# Altium PCB carte_puissance.PcbDoc
Units mil, origin at the board's own origin, x right, y up, seen from the top; angles counter-clockwise.
Board outline 1929.13 x 2500 mil, 4 copper layers (Top Layer, Internal Plane 1, Internal Plane 2, Bottom Layer); 11 components, 9 nets, 38 pads, 3 vias.
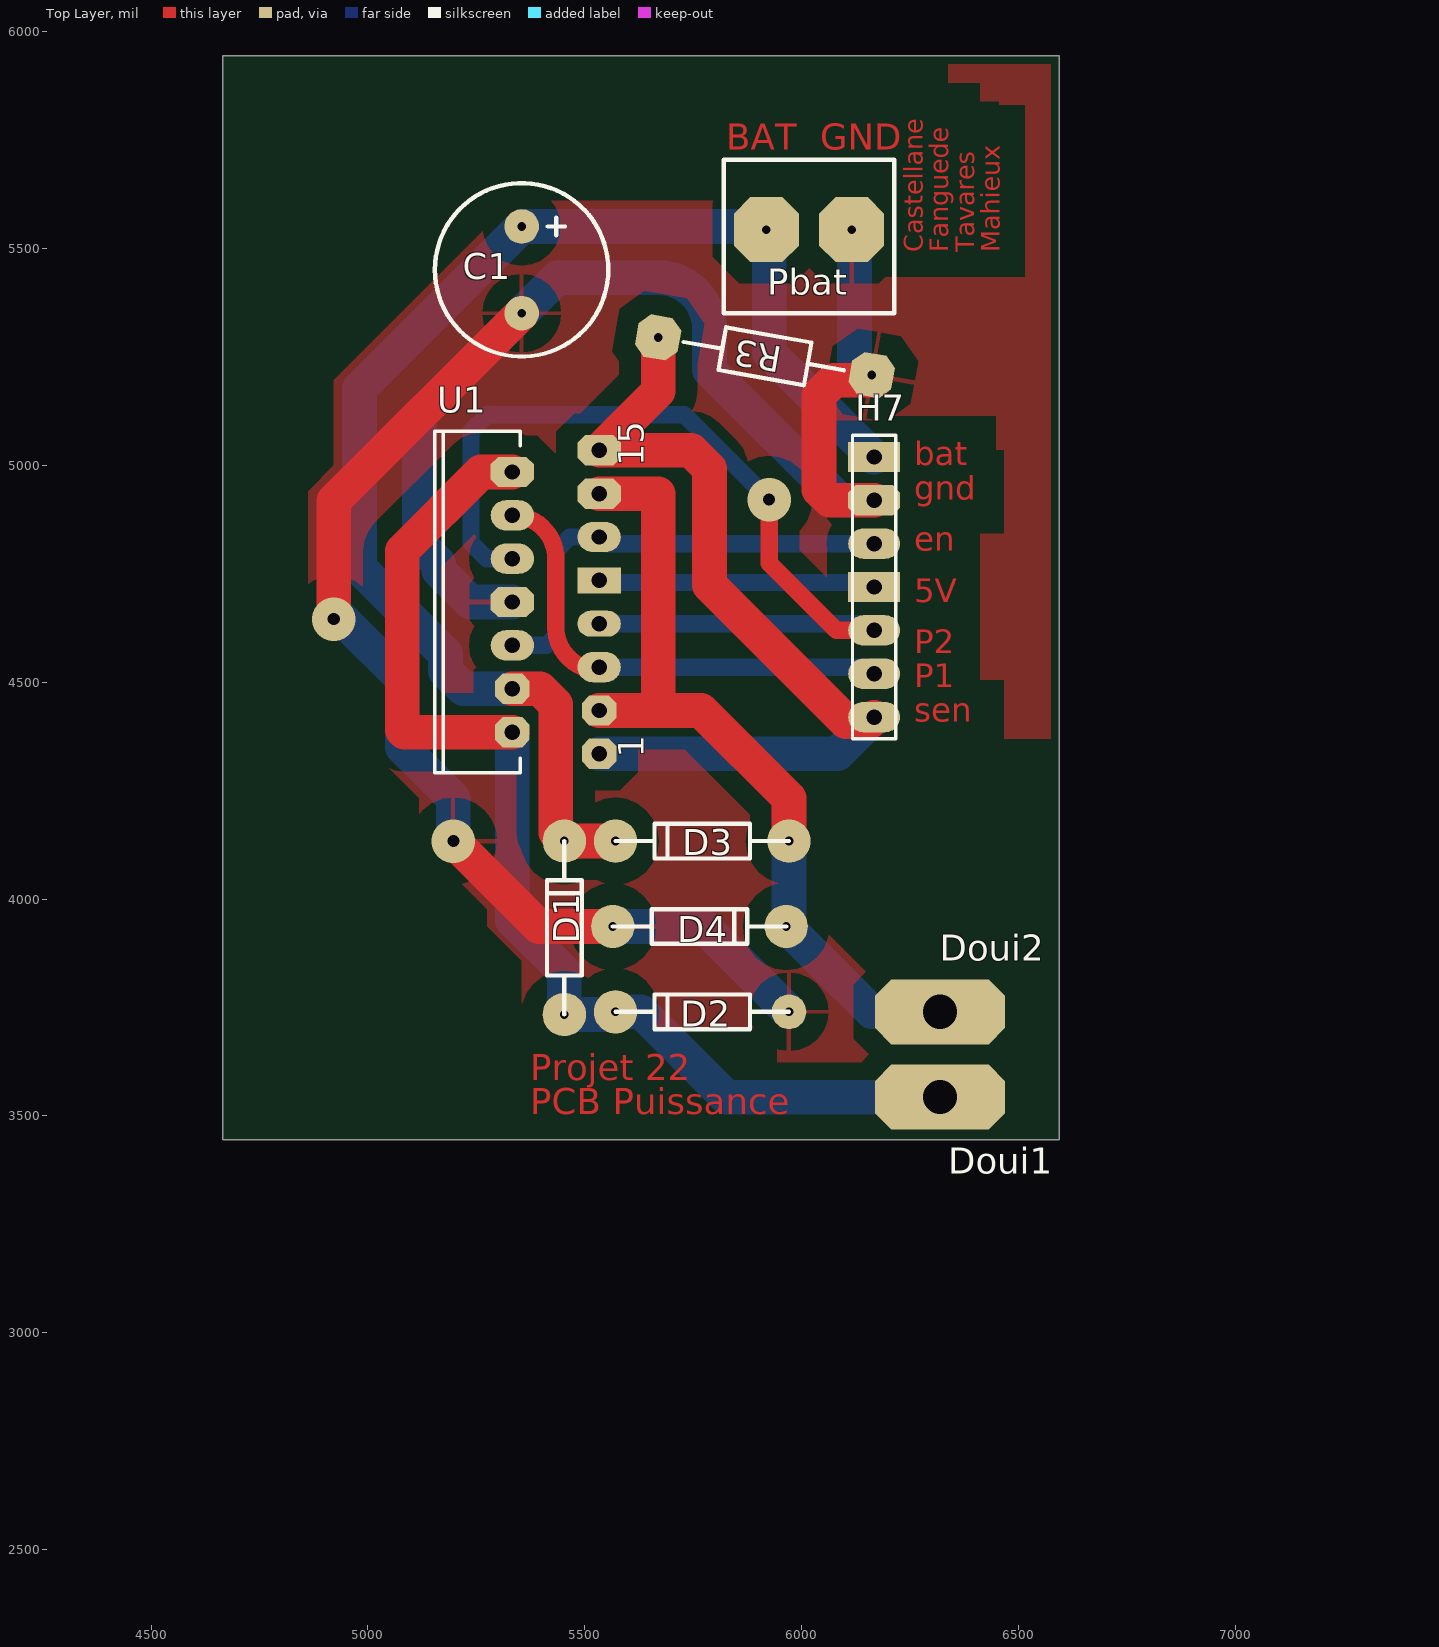
[diagram p0: Top Layer view]
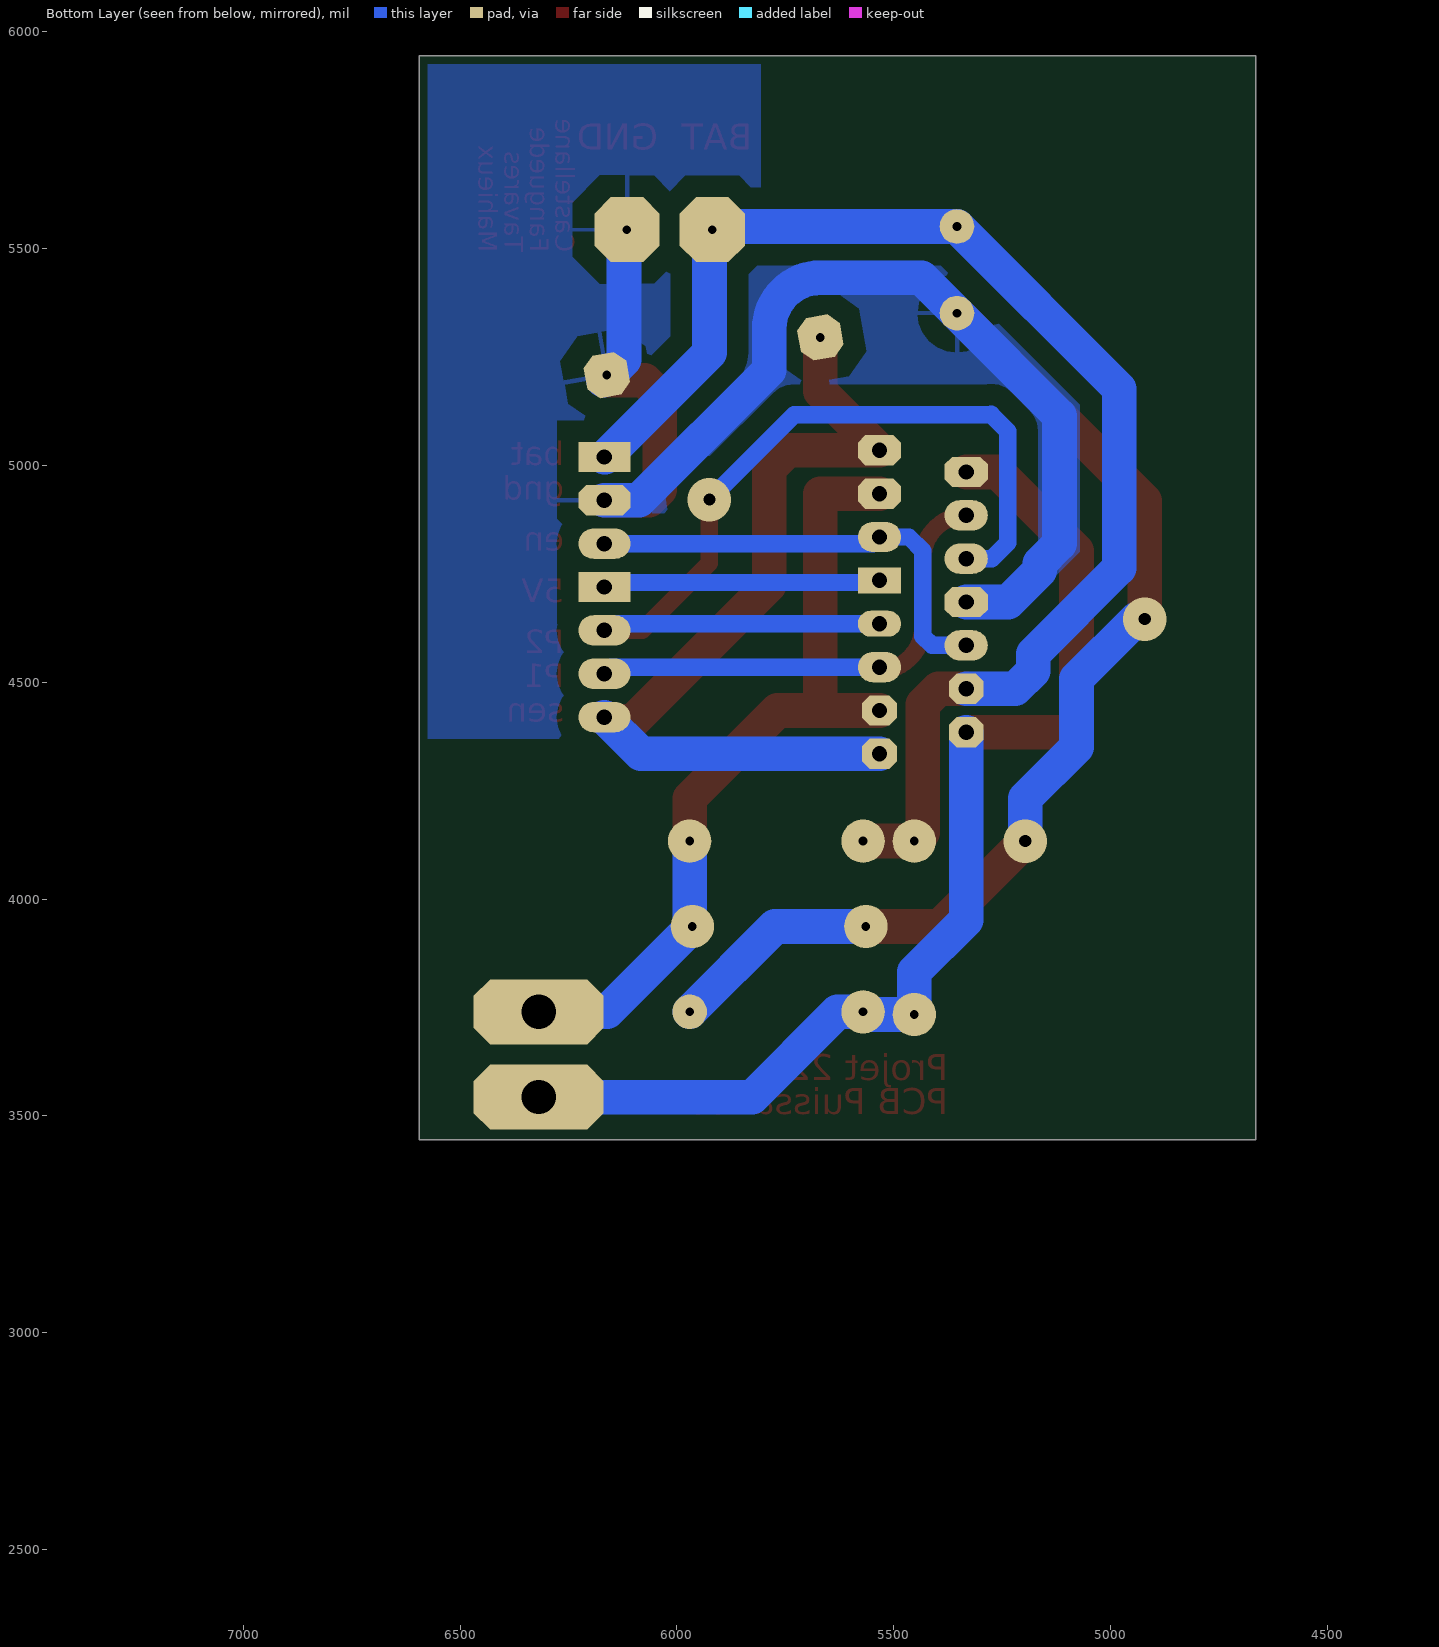
[diagram p1: Bottom Layer view, seen from below]
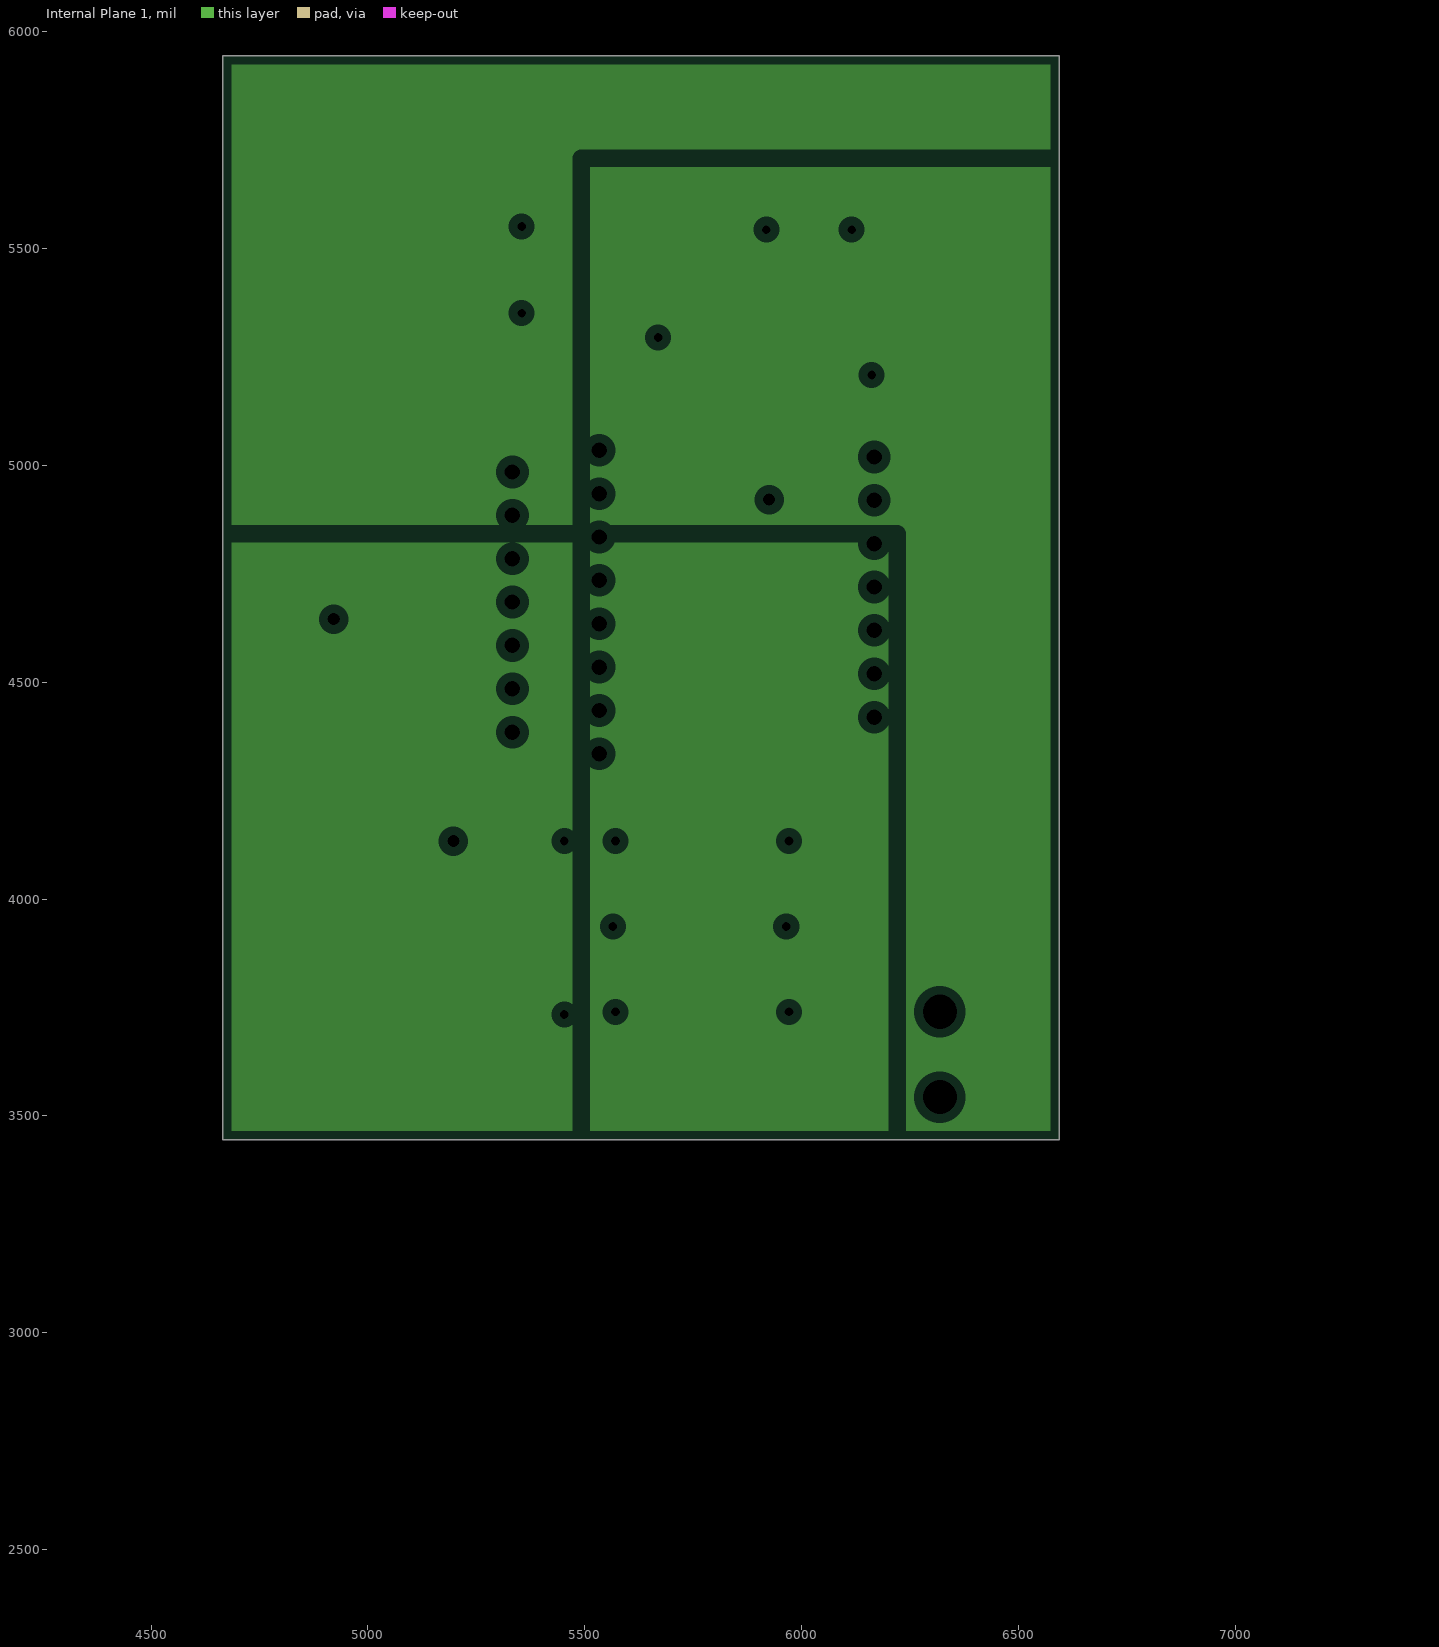
[diagram p2: Internal Plane 1, clearances drawn from the general rule]
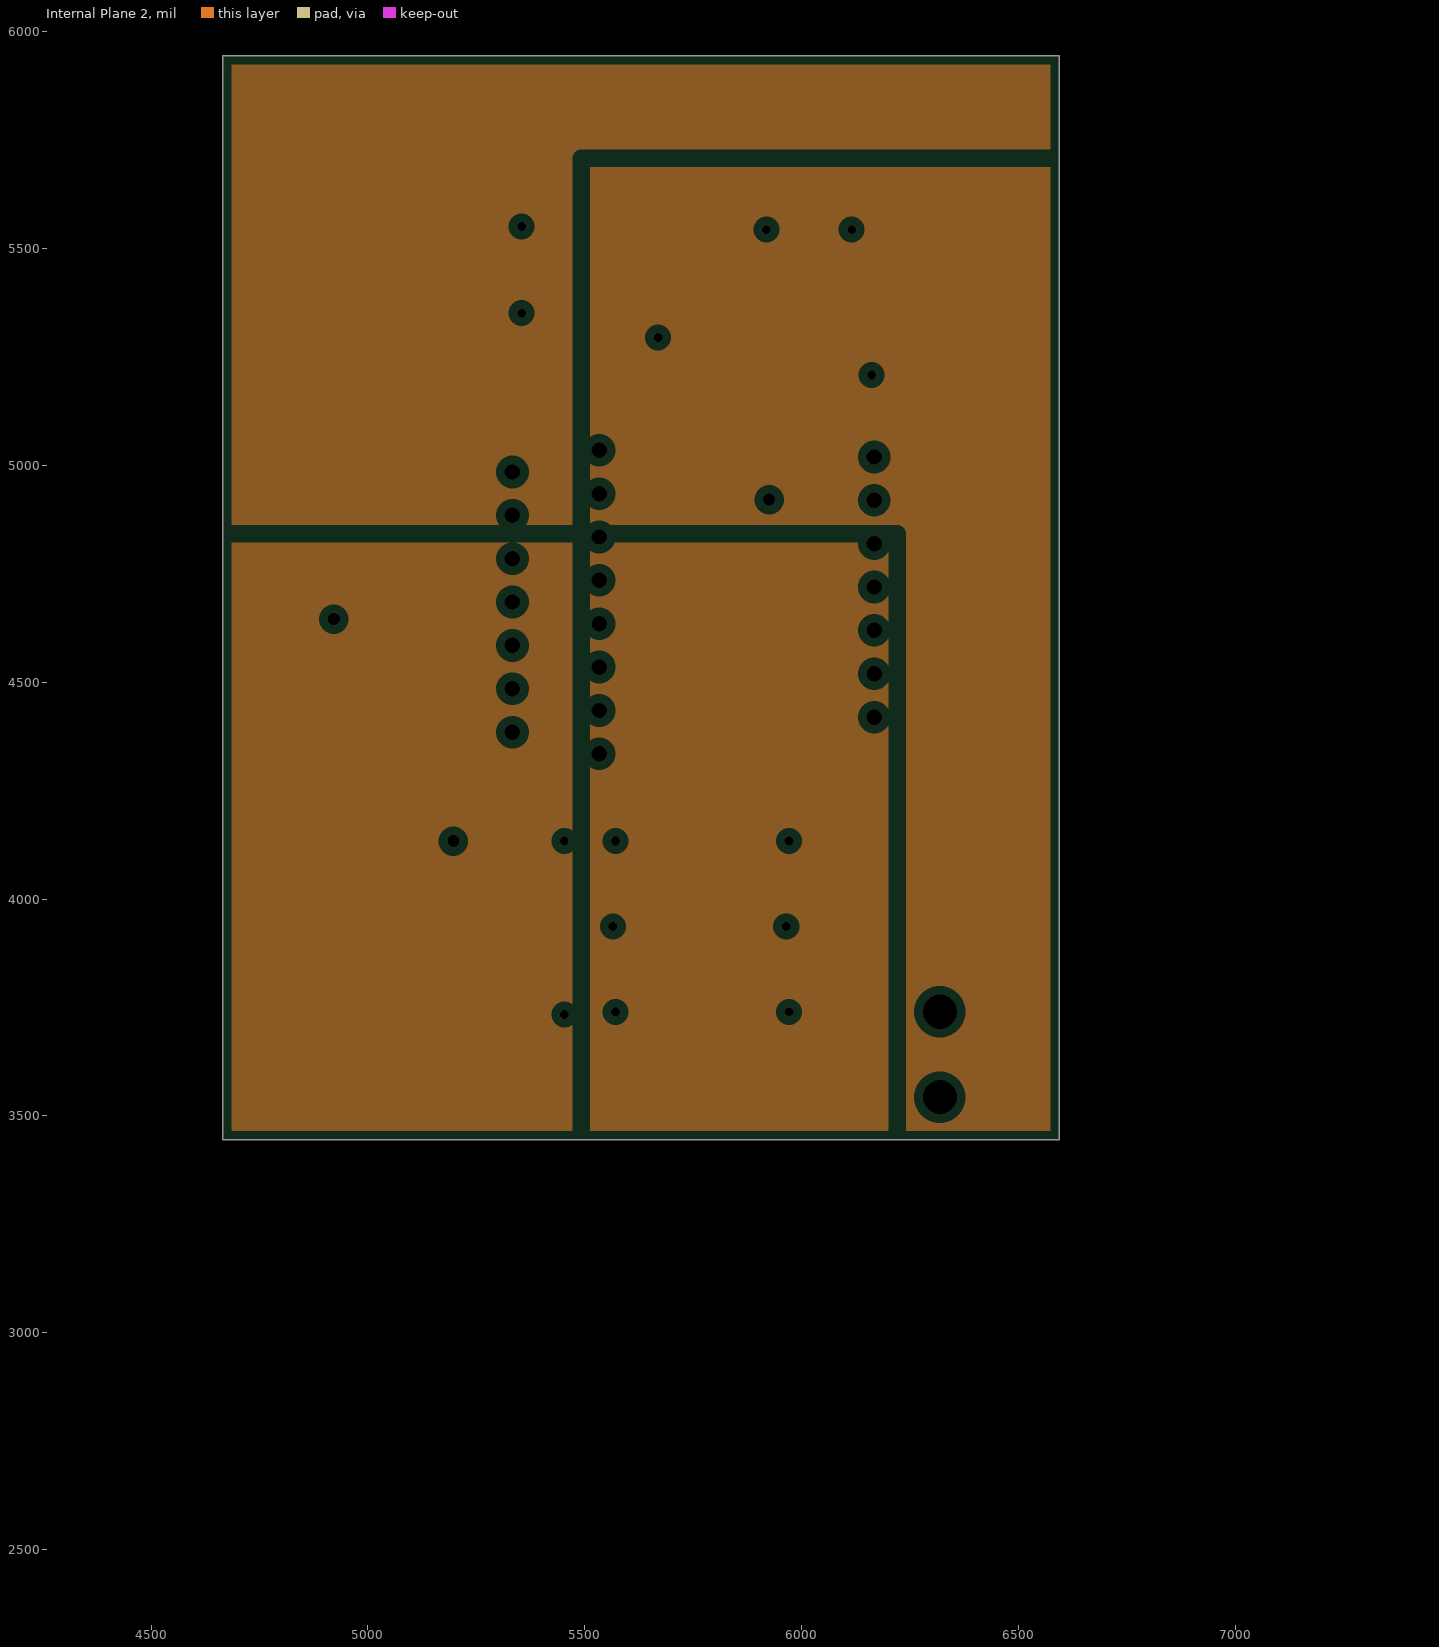
[diagram p3: Internal Plane 2, clearances drawn from the general rule]

## Layer stack, top to bottom
Top Layer: signal copper 1.4
Dielectric: dielectric 12.6, FR-4, Dk 4.8
Internal Plane 1: plane copper 1.4
Dielectric: dielectric 12.6, FR-4, Dk 4.8
Internal Plane 2: plane copper 1.4
Dielectric: dielectric 12.6, FR-4, Dk 4.8
Bottom Layer: signal copper 1.4

## Board outline
4665.35,5944.88 6594.49,5944.88 6594.49,3444.88 4665.35,3444.88

## Design rules (kind name [scope] priority, off if disabled: settings)
Clearance [All] p1: gap=20
FabricationTestPointUsage TestPointUsage [All] p1: valid=0 allowmultiple=FALSE
FabricationTestpoint Testpoint [All] p1: side=3 testpointundercomponent=TRUE minsize=40 maxsize=100 preferedsize=60 minholesize=0 maxholesize=40 preferedholesize=32 testpointgrid=1 allowsidetop=TRUE allowsidebottom=TRUE usegrid=TRUE gridtolerance=0.01
PlaneClearance [All] p1: clearance=20
PlaneConnect [All] p1: planeconnectstyle=Relief reliefexpansion=20 reliefentries=4 reliefconductorwidth=10 reliefairgap=10
PolygonConnect [All] p1: connectstyle=Relief reliefconductorwidth=10 reliefentries=4 polygonreliefangle="90 Angle"
RoutingVias [All] p1: holewidth=20 width=70 viastyle="Through Hole" minholewidth=28 minwidth=50 maxholewidth=28 maxwidth=50
SilkscreenOverComponentPads [All] p1: minsilkscreentomaskgap=10
SolderMaskExpansion [All] p1: expansion=4
Width [All] p1: maxlimit=200 minlimit=20 preferedwidth=40
23 further rules are at their usual default settings.

## Components (designator, comment, footprint, x,y, rotation, side; value= is the part's Value field where it differs from the comment)
C1 "Cap Pol2" Capa2_pol 5354.33,5551.18 r270 top
D1 "Diode 1N4148" Ddiode#1 5452.76,4133.86 r270 top
D2 "Diode 1N4148" Ddiode#2 5570.87,3740.16 r0 top
D3 "Diode 1N4148" Ddiode#1 5570.87,4133.86 r0 top
D4 "Diode 1N4148" Ddiode#1 5964.57,3937.01 r180 top
Doui1 "douille_2mm" Douille-2mm 6318.9,3543.31 r90 top
Doui2 "douille_2mm" Douille-2mm 6318.9,3740.16 r90 top
H7 "Header 7" HDR1X7 6167.44,5019.69 r270 top
Pbat "Batterie" Bornier_2 5820.2,5543.74 r0 top
R3 "Res2" res5_1/4W 5669.29,5295.28 r350 top
U1 "L298N" Multiwatt15V 5433.07,4685.04 r90 top

## Footprints (in the part's own frame and the unit in brackets; to place one, negate y for a bottom-side part, rotate by r counter-clockwise, add the part's x,y. Pads: shape width x height; smd on the part's side, far side on the other; paste and mask are expansions set on the pad)
Bornier_2 [mil]
  oct 150x150 hole 20: 1(98.43,0) 2(295.28,0)
  silkscreen extent 0,-193 394,161
Capa2_pol [mil]
  round 80 hole 20: 1(0,0) 2(200,0)
  silkscreen extent -100,-200 300,200
Ddiode#1 [mil]
  round 100 hole 20: A(400,0) K(0,0)
  silkscreen extent 0,-40 400,40
Ddiode#2 [mil]
  round 80 hole 20: A(400,0)
  round 100 hole 20: K(0,0)
  silkscreen extent 0,-40 400,40
Douille-2mm [mm]
  oct 3.81x7.62 hole 2: 1(0,0)
HDR1X7 [mil] "Connector; Header; 7 Position"
  rect 70x120 hole 35.43: 1(0,0) 4(300,0)
  oct 70x120 hole 35.43: 2(100,0)
  oval 70x120 hole 35.43: 3(200,0) 5(400,0) 6(500,0) 7(600,0)
  silkscreen extent -50,-50 650,50
Multiwatt15V [mil] "TO, Thru-Hole, Vertical, Heatsink Mounted; 15 Bent Staggered Leads; Pitch 1.27 mm"
  oct 70x80 hole 35.43: 1(-350,-100) 2(-300,100) 3(-250,-100) 4(-200,100)
  oval 70x100 hole 35.43: 5(-150,-100) 6(-100,100) 10(100,100) 11(150,-100) 12(200,100)
  oval 60x100 hole 35.43: 7(-50,-100)
  oct 70x100 hole 35.43: 8(0,100) 13(250,-100) 14(300,100) 15(350,-100)
  rect 60x100 hole 35.43: 9(50,-100)
  silkscreen extent -394,82 394,279
res5_1/4W [mil]
  oct 100x100 hole 20: 1(0,0) 2(500,0)
  silkscreen extent 60,-50 435,50

## Part data
C1: "Polarized Capacitor (Radial)"
D1 D2 D3 D4: "High Conductance Fast Diode"
Doui1 Doui2: "1-Pin"
H7: "Header, 7-Pin"
Pbat: library part Bornier_2, "Header, 2-Pin"
R3: "Resistor"
U1: "Dual Full Bridge Driver"

## Via types
v1: diameter 100, hole 28, Top Layer to Bottom Layer, 3 vias

## Nets (pads, with @x,y where several pads share a name; then routed paths per layer and width w, separated by ;. In a path a pad name is that pad's centre, name@x,y a point inside that pad or via, vN(x,y) a via of type N, cw(c..) or ccw(c..) an arc to the next point about the centre after c; other vN are vias at no path point)
EN: H7.3 U1.6 U1.11 | length 1059.6
  Bottom Layer w40: U1.6 5411.81,4585.04 5433.07,4606.3 5433.07,4803.15 5464.96,4835.04 U1.11 5548.43,4819.69 H7.3
GND: C1.2 D2.A D4.A H7.2 Pbat.2 R3.2 U1.8 | length 5376.1
  Top Layer w80: v1(4921.26,4645.67) 4921.26,4918.11 C1.2 ; v1(5196.85,4133.86) 5393.7,3937.01 D4.A ; H7.2 6064.57,4919.69 6040,4944.25 6040,5162.05 6074.8,5196.85 R3.2@6169.29,5196.85
  Bottom Layer w80: v1(4921.26,4645.67) 4940.94,4645.67 5078.74,4507.87 5078.74,4350.39 5196.85,4232.28 v1(5196.85,4133.86) ; U1.8 5236.22,4685.04 5163.59,4757.67 5163.59,4773.99 5118.11,4819.46 5118.11,5114.96 C1.2 5436.22,5433.07 5669.29,5433.07 cw(c5669.29,5314.96) 5787.4,5314.96 5787.4,5219.87 6087.59,4919.69 H7.2 ; D4.A 5774.02,3937.01 D2.A ; Pbat.2@6122.05,5551.18 6122.05,5244.09 R3.2@6169.29,5196.85
MOTOR1: D1.A D2.K Doui1.1 U1.2 U1.14 | length 2524
  Top Layer w80: 5078.74,4389.76 5078.74,4803.15 5260.63,4985.04 U1.14 ; 5083.46,4385.04 U1.2
  Bottom Layer w80: U1.2 5333.07,3951.97 5452.76,3832.28 D1.A 5564.57,3733.86 D2.K 5629.92,3740.16 5826.77,3543.31 Doui1.1@6199.21,3543.31
MOTOR2: D3.A D4.K Doui2.1 U1.3 U1.13 | length 1891.8
  Top Layer w80: U1.3 5669.29,4435.04 ; U1.13 5669.29,4935.04 5669.29,4435.04 ; D3.A 5970.87,4232.28 5768.11,4435.04 5669.29,4435.04
  Bottom Layer w80: D3.A 5970.87,3943.31 D4.K 6043.31,3858.27 6161.42,3740.16 Doui2.1
PWM1: H7.6 U1.5 U1.12 | length 1131.4
  Top Layer w20: H7.6@6152.09,4535.04 H7.6
  Top Layer w40: U1.12@5333.07,4885.05 cw(c5333.07,4785.04) 5433.07,4783.46 5433.07,4625.98 ccw(c5533.07,4627.6) U1.5@5533.07,4527.58 ; U1.5@5514.08,4535.04 U1.5
  Bottom Layer w40: U1.5 H7.6@6152.09,4535.04
PWM2: H7.5 U1.7 U1.10 | length 2247.4
  Top Layer w40: v1(5925.2,4921.26) 5925.2,4774.8 6080.31,4619.69 H7.5
  Bottom Layer w40: 5275.59,5118.11 5275.59,5116.85 ; U1.10 5274.02,4785.04 5237.48,4821.57 5237.48,5078.74 5275.59,5116.85 ; U1.7 6152.09,4635.04 H7.5 ; v1(5925.2,4921.26) 5729.61,5116.85 5275.59,5116.85
SENSE: H7.7 R3.1 U1.1 U1.15 | length 2040.9
  Top Layer w80: R3.1 5669.29,5171.26 U1.15 5744.96,5035.04 5787.4,4992.6 5787.4,4724.41 6102.36,4409.45 6157.2,4409.45 H7.7
  Bottom Layer w80: U1.1 6082.8,4335.04 H7.7
V_5V_FPT: H7.4 U1.9 | length 633.8
  Bottom Layer w40: U1.9@5537.95,4730.16 6156.97,4730.16 H7.4
V_BAT: C1.1 D1.K D3.K H7.1 Pbat.1 U1.4 | length 3193.6
  Top Layer w80: U1.4 5396.85,4485.04 5433.07,4448.82 5433.07,4153.54 D1.K D3.K
  Bottom Layer w80: U1.4 5219.69,4485.04 5178.74,4525.98 5178.74,4565.35 4980.31,4763.78 4980.31,5177.17 C1.1 5925.2,5551.18 5925.2,5260.15 6165.67,5019.69 H7.1

## Polygon pours and split planes (outlines as drawn)
GND on Top Layer "Bottom Layer-No Net" (solid, remove dead copper, pour order 5): 4685.04,5925.2 6574.8,5925.2 6574.8,3464.57 4685.04,3464.57
GND on Bottom Layer "Bottom Layer-GND" (solid, remove dead copper, pour order 7): 4685.04,5925.2 6574.8,5925.2 6574.8,3464.57 4685.04,3464.57
no net on Internal Plane 1 (split plane): 6200.38,3464.98 5512.22,3464.98 5512.22,4822.42 6200.38,4822.42
no net on Internal Plane 1 (split plane): 6574.39,3464.98 6240.57,3464.98 6240.57,4842.52 6240.18,4846.44 6239.04,4850.21 6237.18,4853.68 6234.68,4856.73 6231.64,4859.23 6228.16,4861.09 6224.39,4862.23 6220.47,4862.62 5512.22,4862.62 5512.22,5688.56 6574.39,5688.56
no net on Internal Plane 1 (split plane): 6574.39,5728.76 5492.13,5728.76 5488.21,5728.37 5484.44,5727.23 5480.96,5725.37 5477.92,5722.87 5475.42,5719.83 5473.56,5716.35 5472.42,5712.58 5472.03,5708.66 5472.03,4862.62 4685.45,4862.62 4685.45,5924.79 6574.39,5924.79
no net on Internal Plane 1 (split plane): 5472.03,3464.98 4685.45,3464.98 4685.45,4822.42 5472.03,4822.42
no net on Internal Plane 2 (split plane): 6200.38,3464.98 5512.22,3464.98 5512.22,4822.42 6200.38,4822.42
no net on Internal Plane 2 (split plane): 6574.39,3464.98 6240.57,3464.98 6240.57,4842.52 6240.18,4846.44 6239.04,4850.21 6237.18,4853.68 6234.68,4856.73 6231.64,4859.23 6228.16,4861.09 6224.39,4862.23 6220.47,4862.62 5512.22,4862.62 5512.22,5688.56 6574.39,5688.56
no net on Internal Plane 2 (split plane): 6574.39,5728.76 5492.13,5728.76 5488.21,5728.37 5484.44,5727.23 5480.96,5725.37 5477.92,5722.87 5475.42,5719.83 5473.56,5716.35 5472.42,5712.58 5472.03,5708.66 5472.03,4862.62 4685.45,4862.62 4685.45,5924.79 6574.39,5924.79
no net on Internal Plane 2 (split plane): 5472.03,3464.98 4685.45,3464.98 4685.45,4822.42 5472.03,4822.42

## Other copper
Top Layer:
  text "BAT" at 5826.77,5728.35 h60
  text "GND" at 6043.31,5728.35 h60
  text "Castellane" at 6279.53,5492.13 h43.31 r90
  text "Fanguede" at 6338.58,5492.13 h43.31 r90
  text "Tavares" at 6397.64,5492.13 h43.31 r90
  text "Mahieux" at 6456.69,5492.13 h43.31 r90
  text "bat" at 6259.84,5000 h55.12
  text "gnd" at 6259.84,4921.26 h55.12
  text "en" at 6259.84,4803.15 h55.12
  text "5V" at 6259.84,4685.04 h55.12
  text "P2" at 6259.84,4566.93 h55.12
  text "P1" at 6259.84,4488.19 h55.12
  text "sen" at 6259.84,4409.45 h55.12
  text "Projet 22" at 5374.02,3582.68 h60
  text "PCB Puissance" at 5374.02,3503.94 h60
Multi-Layer:
  pour cut-out: 6122.05,4311.02 6200.79,4370.08 6574.8,4370.08 6574.8,3838.58 6200.79,3838.58 6161.42,3818.9 6141.73,3838.58 6023.62,3956.69 6023.62,4271.65 6102.36,4291.34
  pour cut-out: 5354.33,3858.27 5275.59,3937.01 5275.59,3976.38 5118.11,4133.86 5118.11,4232.28 5019.69,4330.71 5019.69,4488.19 4940.94,4566.93 4881.89,4566.93 4862.2,4586.61 4862.2,4940.94 4921.26,5000 4921.26,5196.85 5334.65,5610.24 5807.09,5610.24 5807.09,5925.2 4685.04,5925.2 4685.04,3464.57 5354.33,3464.57

## Text inside footprints (layer, text, board x,y; h text height)
U1: Top Overlay "1" at 5636.42,4325.98 h59.06 r90; Top Overlay "15" at 5636.42,4997.64 h59.06 r90